# EAGLE board led_strip_panel (EAGLE 5.06)
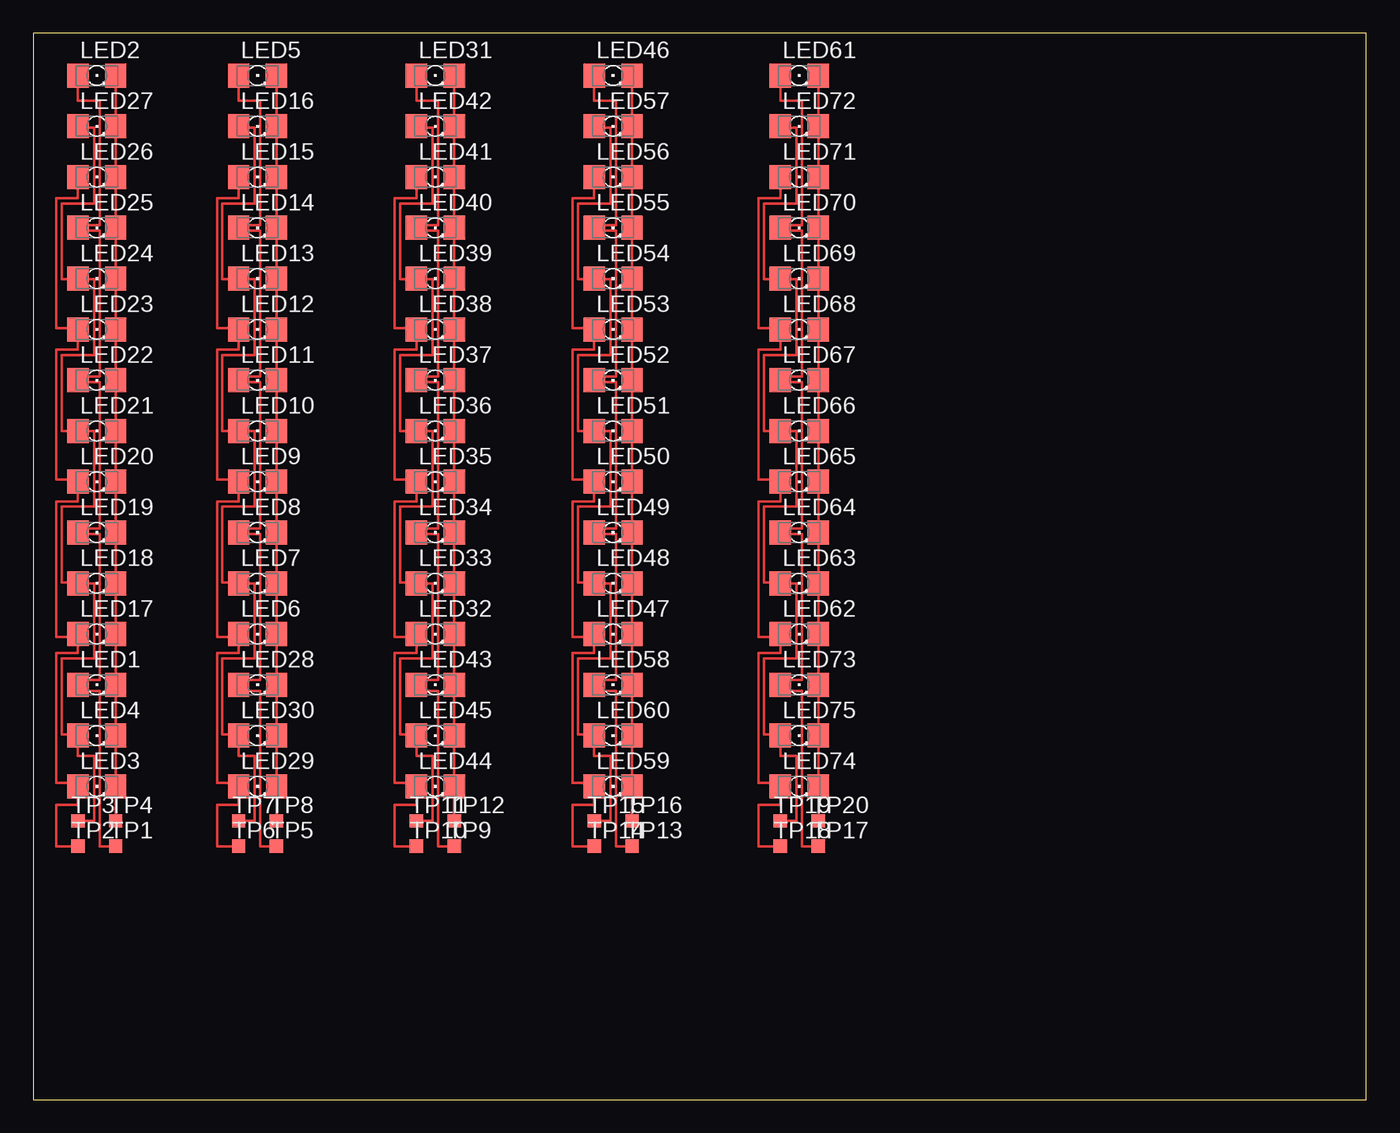
[diagram p0: board, top side]

Size 100 x 80 mm. Coordinates in mm from the lower left corner, seen from the top.
Outline: 0,0 100,0 100,80 0,80 0,0
Copper layers (1*16): Top 0.035mm / dielectric 1.5mm / Bottom 0.035mm
Design rules "default *": minimum track width 8mil, minimum drill 24mil, track to track 8mil, track to pad 8mil, pad to pad 8mil, via to via 8mil, smd to smd 8mil, copper to edge 40mil, drill to drill 8mil, minimum pad ring 10mil, minimum via ring 8mil, stop-mask expansion 4mil, vias tented up to drill 0mil, thermal gap 10mil

## Footprints (pad centres in the part's own frame; a part is rotated, then mirrored left to right if it is on the bottom)
1206 = smd 1.6 x 1.803: A -1.422,0; C 1.422,0
TP10SQ = smd 1 x 1: TP 0,0

## Placement (x,y rotation side)
LED1  1206  [1206]  4.76,31.12 0 top
LED2  1206  [1206]  4.76,76.83 0 top
LED3  1206  [1206]  4.76,23.5 0 top
LED4  1206  [1206]  4.76,27.31 0 top
LED5  1206  [1206]  16.83,76.83 0 top
LED6  1206  [1206]  16.83,34.92 0 top
LED7  1206  [1206]  16.83,38.73 0 top
LED8  1206  [1206]  16.83,42.55 0 top
LED9  1206  [1206]  16.83,46.35 0 top
LED10  1206  [1206]  16.83,50.16 0 top
LED11  1206  [1206]  16.83,53.98 0 top
LED12  1206  [1206]  16.83,57.78 0 top
LED13  1206  [1206]  16.83,61.59 0 top
LED14  1206  [1206]  16.83,65.41 0 top
LED15  1206  [1206]  16.83,69.22 0 top
LED16  1206  [1206]  16.83,73.03 0 top
LED17  1206  [1206]  4.76,34.92 0 top
LED18  1206  [1206]  4.76,38.73 0 top
LED19  1206  [1206]  4.76,42.55 0 top
LED20  1206  [1206]  4.76,46.35 0 top
LED21  1206  [1206]  4.76,50.16 0 top
LED22  1206  [1206]  4.76,53.98 0 top
LED23  1206  [1206]  4.76,57.78 0 top
LED24  1206  [1206]  4.76,61.59 0 top
LED25  1206  [1206]  4.76,65.41 0 top
LED26  1206  [1206]  4.76,69.22 0 top
LED27  1206  [1206]  4.76,73.03 0 top
LED28  1206  [1206]  16.83,31.12 0 top
LED29  1206  [1206]  16.83,23.5 0 top
LED30  1206  [1206]  16.83,27.31 0 top
LED31  1206  [1206]  30.16,76.83 0 top
LED32  1206  [1206]  30.16,34.92 0 top
LED33  1206  [1206]  30.16,38.73 0 top
LED34  1206  [1206]  30.16,42.55 0 top
LED35  1206  [1206]  30.16,46.35 0 top
LED36  1206  [1206]  30.16,50.16 0 top
LED37  1206  [1206]  30.16,53.98 0 top
LED38  1206  [1206]  30.16,57.78 0 top
LED39  1206  [1206]  30.16,61.59 0 top
LED40  1206  [1206]  30.16,65.41 0 top
LED41  1206  [1206]  30.16,69.22 0 top
LED42  1206  [1206]  30.16,73.03 0 top
LED43  1206  [1206]  30.16,31.12 0 top
LED44  1206  [1206]  30.16,23.5 0 top
LED45  1206  [1206]  30.16,27.31 0 top
LED46  1206  [1206]  43.5,76.83 0 top
LED47  1206  [1206]  43.5,34.92 0 top
LED48  1206  [1206]  43.5,38.73 0 top
LED49  1206  [1206]  43.5,42.55 0 top
LED50  1206  [1206]  43.5,46.35 0 top
LED51  1206  [1206]  43.5,50.16 0 top
LED52  1206  [1206]  43.5,53.98 0 top
LED53  1206  [1206]  43.5,57.78 0 top
LED54  1206  [1206]  43.5,61.59 0 top
LED55  1206  [1206]  43.5,65.41 0 top
LED56  1206  [1206]  43.5,69.22 0 top
LED57  1206  [1206]  43.5,73.03 0 top
LED58  1206  [1206]  43.5,31.12 0 top
LED59  1206  [1206]  43.5,23.5 0 top
LED60  1206  [1206]  43.5,27.31 0 top
LED61  1206  [1206]  57.47,76.83 0 top
LED62  1206  [1206]  57.47,34.92 0 top
LED63  1206  [1206]  57.47,38.73 0 top
LED64  1206  [1206]  57.47,42.55 0 top
LED65  1206  [1206]  57.47,46.35 0 top
LED66  1206  [1206]  57.47,50.16 0 top
LED67  1206  [1206]  57.47,53.98 0 top
LED68  1206  [1206]  57.47,57.78 0 top
LED69  1206  [1206]  57.47,61.59 0 top
LED70  1206  [1206]  57.47,65.41 0 top
LED71  1206  [1206]  57.47,69.22 0 top
LED72  1206  [1206]  57.47,73.03 0 top
LED73  1206  [1206]  57.47,31.12 0 top
LED74  1206  [1206]  57.47,23.5 0 top
LED75  1206  [1206]  57.47,27.31 0 top
TP1  1.1  [TP10SQ]  6.18,19.01 0 top
TP2  1.2  [TP10SQ]  3.34,19.01 0 top
TP3  1.3  [TP10SQ]  3.34,20.9 0 top
TP4  1.4  [TP10SQ]  6.18,20.9 0 top
TP5  1.1  [TP10SQ]  18.25,19.01 0 top
TP6  1.2  [TP10SQ]  15.41,19.01 0 top
TP7  1.3  [TP10SQ]  15.41,20.9 0 top
TP8  1.4  [TP10SQ]  18.25,20.9 0 top
TP9  1.1  [TP10SQ]  31.58,19.01 0 top
TP10  1.2  [TP10SQ]  28.74,19.01 0 top
TP11  1.3  [TP10SQ]  28.74,20.9 0 top
TP12  1.4  [TP10SQ]  31.58,20.9 0 top
TP13  1.1  [TP10SQ]  44.92,19.01 0 top
TP14  1.2  [TP10SQ]  42.08,19.01 0 top
TP15  1.3  [TP10SQ]  42.08,20.9 0 top
TP16  1.4  [TP10SQ]  44.92,20.9 0 top
TP17  1.1  [TP10SQ]  58.89,19.01 0 top
TP18  1.2  [TP10SQ]  56.05,19.01 0 top
TP19  1.3  [TP10SQ]  56.05,20.9 0 top
TP20  1.4  [TP10SQ]  58.89,20.9 0 top

## Library data of the parts
LED1-LED75 = led
TP1-TP20 = testpad

## Nets
LED1.1: LED1.A LED2.A LED19.A LED22.A LED25.A TP1.TP
LED1.2: LED3.A LED17.A LED20.A LED23.A LED26.A TP2.TP
LED1.3: LED4.A LED18.A LED21.A LED24.A LED27.A TP3.TP
LED1.4: LED1.C LED2.C LED3.C LED4.C LED17.C LED18.C LED19.C LED20.C LED21.C LED22.C LED23.C LED24.C LED25.C LED26.C LED27.C TP4.TP
LED1.5: LED5.A LED8.A LED11.A LED14.A LED28.A TP5.TP
LED1.6: LED6.A LED9.A LED12.A LED15.A LED29.A TP6.TP
LED1.7: LED7.A LED10.A LED13.A LED16.A LED30.A TP7.TP
LED1.8: LED5.C LED6.C LED7.C LED8.C LED9.C LED10.C LED11.C LED12.C LED13.C LED14.C LED15.C LED16.C LED28.C LED29.C LED30.C TP8.TP
LED1.9: LED31.A LED34.A LED37.A LED40.A LED43.A TP9.TP
LED1.10: LED32.A LED35.A LED38.A LED41.A LED44.A TP10.TP
LED1.11: LED33.A LED36.A LED39.A LED42.A LED45.A TP11.TP
LED1.12: LED31.C LED32.C LED33.C LED34.C LED35.C LED36.C LED37.C LED38.C LED39.C LED40.C LED41.C LED42.C LED43.C LED44.C LED45.C TP12.TP
LED1.13: LED46.A LED49.A LED52.A LED55.A LED58.A TP13.TP
LED1.14: LED47.A LED50.A LED53.A LED56.A LED59.A TP14.TP
LED1.15: LED48.A LED51.A LED54.A LED57.A LED60.A TP15.TP
LED1.16: LED46.C LED47.C LED48.C LED49.C LED50.C LED51.C LED52.C LED53.C LED54.C LED55.C LED56.C LED57.C LED58.C LED59.C LED60.C TP16.TP
LED1.17: LED61.A LED64.A LED67.A LED70.A LED73.A TP17.TP
LED1.18: LED62.A LED65.A LED68.A LED71.A LED74.A TP18.TP
LED1.19: LED63.A LED66.A LED69.A LED72.A LED75.A TP19.TP
LED1.20: LED61.C LED62.C LED63.C LED64.C LED65.C LED66.C LED67.C LED68.C LED69.C LED70.C LED71.C LED72.C LED73.C LED74.C LED75.C TP20.TP

## Tracks (layer width: path | path; a pad name or v marks a point on that pad's centre or on a via)
LED1.1
  Top 0.203: LED2.A 3.34,74.95 4.97,74.95 4.97,65.61 3.34,65.61 LED25.A 3.34,65.2 4.97,65.2 4.97,54.23 3.34,54.23 LED22.A 3.34,53.82 4.97,53.82 4.97,42.85 3.34,42.85 | 3.34,42.85 LED19.A | 3.34,42.85 3.75,42.85 3.75,42.44 4.97,42.44 4.97,31.47 3.34,31.47 | 3.34,31.47 LED1.A | 3.34,31.47 3.75,31.47 3.75,30.66 4.97,30.66 4.97,19.01 TP1.TP
LED1.2
  Top 0.203: LED26.A 3.34,67.64 1.71,67.64 1.71,57.89 3.34,57.89 LED23.A 3.34,56.26 1.71,56.26 1.71,46.51 3.34,46.51 LED20.A 3.34,44.88 1.71,44.88 1.71,34.72 | 1.71,34.72 3.34,34.72 LED17.A | 1.71,34.72 3.34,34.72 3.34,33.5 1.71,33.5 1.71,23.75 | 1.71,23.75 3.34,23.75 LED3.A | 1.71,23.75 3.34,23.75 3.34,22.12 1.71,22.12 1.71,19.01 TP2.TP
LED1.3
  Top 0.203: LED27.A 3.34,72.92 4.56,72.92 4.56,67.23 2.12,67.23 2.12,61.54 3.34,61.54 | 3.34,61.54 LED24.A 3.34,61.54 | 3.34,61.54 4.56,61.54 4.56,55.85 2.12,55.85 2.12,50.16 LED21.A | LED21.A | LED21.A 4.56,50.16 4.56,44.48 2.12,44.48 2.12,38.79 3.34,38.79 LED18.A 4.56,38.73 4.56,33.1 2.12,33.1 2.12,27.41 | 2.12,27.41 3.34,27.41 LED4.A | 2.12,27.41 3.34,27.41 3.34,25.78 4.56,25.78 4.56,20.9 TP3.TP
LED1.4
  Top 0.203: LED2.C LED27.C LED26.C LED25.C LED24.C LED23.C LED22.C LED21.C LED20.C LED19.C LED18.C LED17.C LED1.C LED4.C LED3.C | LED3.C 6.35,23.5 | TP4.TP LED3.C
LED1.5
  Top 0.203: LED5.A | LED5.A 15.4,74.95 17.03,74.95 17.03,65.61 15.4,65.61 LED14.A | LED14.A | LED14.A 15.4,65.2 17.03,65.2 17.03,54.23 15.4,54.23 LED11.A | LED11.A | LED11.A 15.4,53.82 17.03,53.82 17.03,42.85 15.4,42.85 | 15.4,42.85 LED8.A | 15.4,42.85 15.81,42.85 15.81,42.44 17.03,42.44 17.03,31.47 15.41,31.47 | 15.41,31.47 LED28.A | 15.41,31.47 15.81,31.47 15.81,30.66 17.03,30.66 17.03,19.01 TP5.TP
LED1.6
  Top 0.203: LED15.A | LED15.A 15.4,67.64 13.78,67.64 13.78,57.89 15.4,57.89 LED12.A | LED12.A | LED12.A 15.4,56.26 13.78,56.26 13.78,46.51 15.4,46.51 LED9.A | LED9.A | LED9.A 15.4,44.88 13.78,44.88 13.78,34.72 | 13.78,34.72 15.4,34.72 | 15.4,34.72 LED6.A | 15.4,34.72 13.78,34.72 | 15.4,34.72 15.4,33.5 13.78,33.5 13.78,23.75 | 13.78,23.75 15.41,23.75 LED29.A | 13.78,23.75 15.4,23.75 15.4,22.12 13.78,22.12 13.78,19.01 TP6.TP
LED1.7
  Top 0.203: LED16.A | LED16.A 15.4,72.92 16.62,72.92 16.62,67.23 14.19,67.23 14.19,61.54 15.4,61.54 | 15.4,61.54 | 15.4,61.54 LED13.A | LED13.A | 15.4,61.54 LED13.A | 15.4,61.54 16.62,61.54 16.62,55.85 14.19,55.85 14.19,50.16 LED10.A | LED10.A | LED10.A 16.62,50.16 16.62,44.48 14.19,44.48 14.19,38.79 15.4,38.79 LED7.A 16.62,38.73 16.62,33.1 14.19,33.1 14.19,27.41 | 14.19,27.41 15.41,27.41 LED30.A | 14.19,27.41 15.4,27.41 15.4,25.78 16.62,25.78 16.62,20.9 TP7.TP
LED1.8
  Top 0.203: LED5.C LED16.C LED15.C LED14.C LED13.C LED12.C LED11.C LED10.C LED9.C LED8.C LED7.C LED6.C LED28.C LED30.C LED29.C | LED29.C 18.41,23.5 | TP8.TP LED29.C
LED1.9
  Top 0.203: LED31.A 28.74,74.95 30.37,74.95 30.37,65.61 28.74,65.61 LED40.A 28.74,65.2 30.37,65.2 30.37,54.23 28.74,54.23 LED37.A 28.74,53.82 30.37,53.82 30.37,42.85 28.74,42.85 | 28.74,42.85 LED34.A | 28.74,42.85 29.15,42.85 29.15,42.44 30.37,42.44 30.37,31.47 28.74,31.47 | 28.74,31.47 LED43.A | 28.74,31.47 29.15,31.47 29.15,30.66 30.37,30.66 30.37,19.01 TP9.TP
LED1.10
  Top 0.203: LED41.A 28.74,67.64 27.11,67.64 27.11,57.89 28.74,57.89 LED38.A 28.74,56.26 27.11,56.26 27.11,46.51 28.74,46.51 LED35.A 28.74,44.88 27.11,44.88 27.11,34.72 | 27.11,34.72 28.74,34.72 LED32.A | 27.11,34.72 28.74,34.72 28.74,33.5 27.11,33.5 27.11,23.75 | 27.11,23.75 28.74,23.75 LED44.A | 27.11,23.75 28.74,23.75 28.74,22.12 27.11,22.12 27.11,19.01 TP10.TP
LED1.11
  Top 0.203: LED42.A 28.74,72.92 29.96,72.92 29.96,67.23 27.52,67.23 27.52,61.54 28.74,61.54 | 28.74,61.54 LED39.A 28.74,61.54 | 28.74,61.54 29.96,61.54 29.96,55.85 27.52,55.85 27.52,50.16 LED36.A | LED36.A | LED36.A 29.96,50.16 29.96,44.48 27.52,44.48 27.52,38.79 28.74,38.79 LED33.A 29.96,38.73 29.96,33.1 27.52,33.1 27.52,27.41 | 27.52,27.41 28.74,27.41 LED45.A | 27.52,27.41 28.74,27.41 28.74,25.78 29.96,25.78 29.96,20.9 TP11.TP
LED1.12
  Top 0.203: LED31.C LED42.C LED41.C LED40.C LED39.C LED38.C LED37.C LED36.C LED35.C LED34.C LED33.C LED32.C LED43.C LED45.C LED44.C | LED44.C 31.75,23.5 | TP12.TP LED44.C
LED1.13
  Top 0.203: LED46.A | LED46.A 42.08,74.95 43.7,74.95 43.7,65.61 42.08,65.61 LED55.A | LED55.A | LED55.A 42.08,65.2 43.7,65.2 43.7,54.23 42.08,54.23 LED52.A | LED52.A | LED52.A 42.08,53.82 43.7,53.82 43.7,42.85 42.08,42.85 | 42.08,42.85 LED49.A | 42.08,42.85 42.48,42.85 42.48,42.44 43.7,42.44 43.7,31.47 42.08,31.47 | 42.08,31.47 LED58.A | 42.08,31.47 42.48,31.47 42.48,30.66 43.7,30.66 43.7,19.01 TP13.TP
LED1.14
  Top 0.203: LED56.A | LED56.A 42.08,67.64 40.45,67.64 40.45,57.89 42.08,57.89 LED53.A | LED53.A | LED53.A 42.08,56.26 40.45,56.26 40.45,46.51 42.08,46.51 LED50.A | LED50.A | LED50.A 42.08,44.88 40.45,44.88 40.45,34.72 | 40.45,34.72 42.08,34.72 | 42.08,34.72 LED47.A | 42.08,34.72 40.45,34.72 | 42.08,34.72 42.08,33.5 40.45,33.5 40.45,23.75 | 40.45,23.75 42.08,23.75 LED59.A | 40.45,23.75 42.08,23.75 42.08,22.12 40.45,22.12 40.45,19.01 TP14.TP
LED1.15
  Top 0.203: LED57.A | LED57.A 42.08,72.92 43.29,72.92 43.29,67.23 40.86,67.23 40.86,61.54 42.08,61.54 | 42.08,61.54 | 42.08,61.54 LED54.A | LED54.A | 42.08,61.54 LED54.A | 42.08,61.54 43.29,61.54 43.29,55.85 40.86,55.85 40.86,50.16 LED51.A | LED51.A | LED51.A 43.29,50.16 43.29,44.48 40.86,44.48 40.86,38.79 42.08,38.79 LED48.A 43.29,38.73 43.29,33.1 40.86,33.1 40.86,27.41 | 40.86,27.41 42.08,27.41 LED60.A | 40.86,27.41 42.08,27.41 42.08,25.78 43.29,25.78 43.29,20.9 TP15.TP
LED1.16
  Top 0.203: LED46.C LED57.C LED56.C LED55.C LED54.C LED53.C LED52.C LED51.C LED50.C LED49.C LED48.C LED47.C LED58.C LED60.C LED59.C | LED59.C 45.09,23.5 | TP16.TP LED59.C
LED1.17
  Top 0.203: LED61.A | LED61.A 56.05,74.95 57.67,74.95 57.67,65.61 56.05,65.61 LED70.A | LED70.A | LED70.A 56.05,65.2 57.67,65.2 57.67,54.23 56.05,54.23 LED67.A | LED67.A | LED67.A 56.05,53.82 57.67,53.82 57.67,42.85 56.05,42.85 | 56.05,42.85 LED64.A | 56.05,42.85 56.45,42.85 56.45,42.44 57.67,42.44 57.67,31.47 56.05,31.47 | 56.05,31.47 LED73.A | 56.05,31.47 56.45,31.47 56.45,30.66 57.67,30.66 57.67,19.01 TP17.TP
LED1.18
  Top 0.203: LED71.A | LED71.A 56.05,67.64 54.42,67.64 54.42,57.89 56.05,57.89 LED68.A | LED68.A | LED68.A 56.05,56.26 54.42,56.26 54.42,46.51 56.05,46.51 LED65.A | LED65.A | LED65.A 56.05,44.88 54.42,44.88 54.42,34.72 | 54.42,34.72 56.05,34.72 | 56.05,34.72 LED62.A | 56.05,34.72 54.42,34.72 | 56.05,34.72 56.05,33.5 54.42,33.5 54.42,23.75 | 54.42,23.75 56.05,23.75 LED74.A | 54.42,23.75 56.05,23.75 56.05,22.12 54.42,22.12 54.42,19.01 TP18.TP
LED1.19
  Top 0.203: LED72.A | LED72.A 56.05,72.92 57.26,72.92 57.26,67.23 54.83,67.23 54.83,61.54 56.05,61.54 | 56.05,61.54 | 56.05,61.54 LED69.A | LED69.A | 56.05,61.54 LED69.A | 56.05,61.54 57.26,61.54 57.26,55.85 54.83,55.85 54.83,50.16 LED66.A | LED66.A | LED66.A 57.26,50.16 57.26,44.48 54.83,44.48 54.83,38.79 56.05,38.79 LED63.A 57.26,38.73 57.26,33.1 54.83,33.1 54.83,27.41 | 54.83,27.41 56.05,27.41 LED75.A | 54.83,27.41 56.05,27.41 56.05,25.78 57.26,25.78 57.26,20.9 TP19.TP
LED1.20
  Top 0.203: LED61.C LED72.C LED71.C LED70.C LED69.C LED68.C LED67.C LED66.C LED65.C LED64.C LED63.C LED62.C LED73.C LED75.C LED74.C | LED74.C 59.05,23.5 | TP20.TP LED74.C